# EAGLE board irdroid_secure (EAGLE 6.5.0)
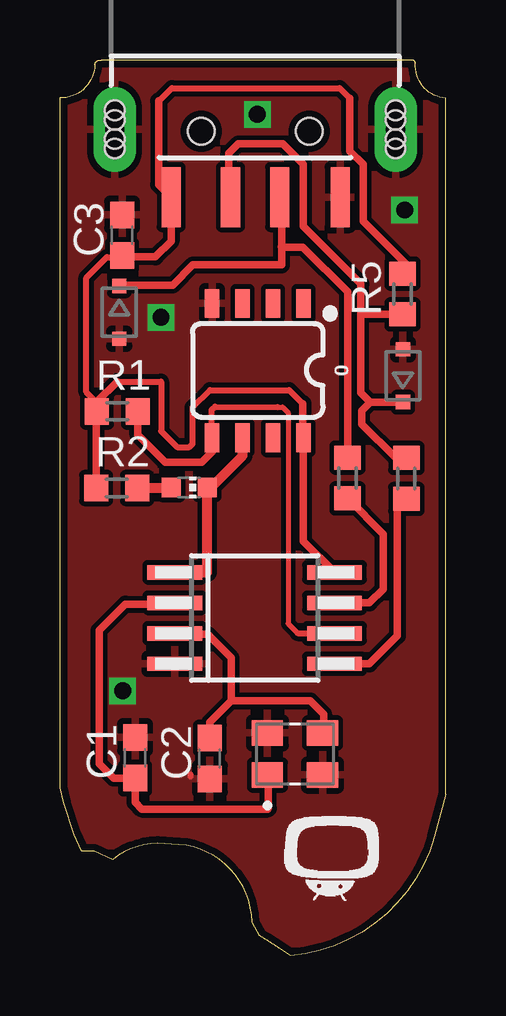
[diagram p0: board, top side]
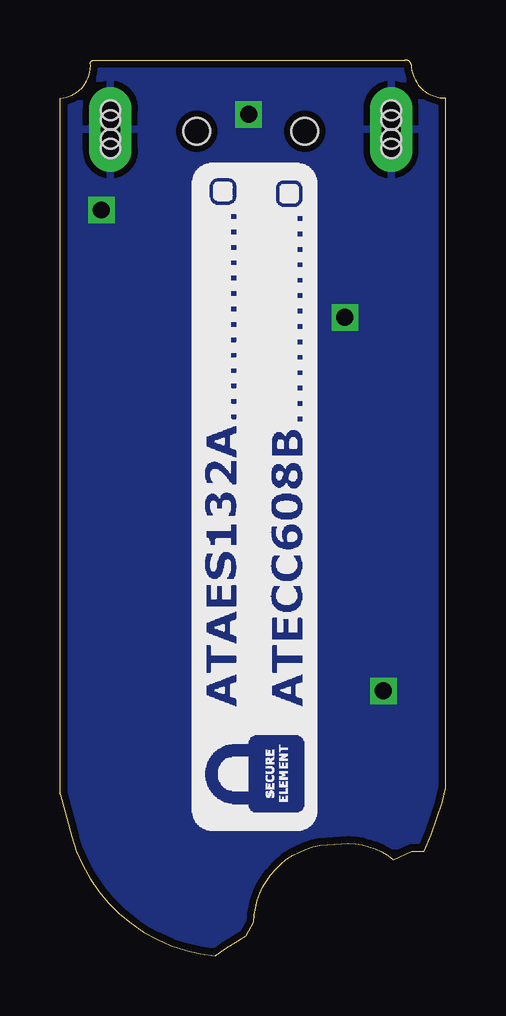
[diagram p1: board, bottom side, seen from below]

Size 16.08 x 37.32 mm. Coordinates in mm from the lower left corner, seen from the top.
Outline: 9.61,0 9.18,0.29 8.58,0.67 8.32,0.84
Outline: 8.32,0.84 8,1.4 arc90 4.64,4.64 arc48 2.2,4.01 1.42,4.35 0.9,4.35 0.6,5.04 0.15,6.38 0,7 0,35.74 arc90 1.45,37.13 arc-90 1.71,37.32 14.64,37.32 arc-90 14.81,37.2
Outline: 9.6,0 arc69 15.6,4.95 16.08,6.72 16.08,35.73 arc-90 14.81,37.2
Outline: 14.81,37.2 14.81,37.19
Copper layers (1*16): Top 0.035mm / dielectric 1.5mm / Bottom 0.035mm
Design rules "default *": minimum track width 8mil, minimum drill 24mil, track to track 8mil, track to pad 8mil, pad to pad 8mil, via to via 8mil, smd to smd 8mil, copper to edge 12mil, drill to drill 8mil, minimum pad ring 10mil, minimum via ring 8mil, stop-mask expansion 4mil, vias tented up to drill 0mil, thermal gap 10mil

## Footprints (pad centres in the part's own frame; a part is rotated, then mirrored left to right if it is on the bottom)
SO08 = smd 0.6 x 1.2: 1 -1.905,-2.8; 2 -0.635,-2.8; 3 0.635,-2.8; 4 1.905,-2.8; 5 1.905,2.8; 6 0.635,2.8; 7 -0.635,2.8; 8 -1.905,2.8
C0603 = smd 1.1 x 1: 1 -0.85,0; 2 0.85,0
SOD323-R = smd 0.6 x 0.6: A 1.1,0; C -1.1,0
USB-A-SMT-MALE = smd 2.5 x 0.8: D+1 10.95,1.027; D-1 10.95,-1.027; GND1 10.95,3.551; VBUS1 10.95,-3.5 | drill 0.8 pad 1.778 long: SHLD1 8.13,-5.85; SHLD2 8.13,5.85 | hole 1.1: 8.2,2.25; 8.2,-2.25 | hole 0.8: 8.53,-5.85; 8.93,-5.85; 7.73,-5.85; 7.33,-5.85; 8.53,5.85; 8.93,5.85; 7.73,5.85; 7.33,5.85
CHIP-LED0603 = smd 0.8 x 0.8: A 0,-0.75; C 0,0.75
SOIC8_EIAJ_208MIL = smd 0.6 x 2.286: 1 -1.905,-3.33; 2 -0.635,-3.33; 3 0.635,-3.33; 4 1.905,-3.33; 5 1.905,3.33; 6 0.635,3.33; 7 -0.635,3.33; 8 -1.905,3.33
R0603 = smd 1 x 1.1: 1 -0.85,0; 2 0.85,0
XTAL_ABM8-16.000MHZ-B2-T = smd 1.05 x 1.3: 1 -0.875,1.15; 2 -0.875,-1.15; 3 0.875,-1.15; 4 0.875,1.15

## Placement (x,y rotation side)
0  Crypto  [SO08]  8.24,24.38 180 top
C1  [C0603]  3.13,8.25 90 top
C2  [C0603]  6.24,8.22 90 top
C3  [C0603]  2.59,30.02 90 top
D1  [SOD323-R]  2.47,26.81 270 top
D2  [SOD323-R]  14.29,24.17 90 top
J1  USB_A_SMT_MALE  [USB-A-SMT-MALE]  8.13,42.56 270 top
LED1  [CHIP-LED0603]  5.38,19.51 270 top
MC  ATTINY45V-10S  [SOIC8_EIAJ_208MIL]  8.11,14.07 270 top
R1  [R0603]  2.39,22.68 0 top
R2  [R0603]  2.36,19.49 0 top
R3  [R0603]  14.43,19.89 270 top
R4  [R0603]  11.98,19.91 270 top
R5  [R0603]  14.27,27.57 90 top
U$2  [IRDROIDLOGO]  13.61,6.08 180 top
Y1  ABM8-16.000MHZ-B2-T  [XTAL_ABM8-16.000MHZ-B2-T]  9.79,8.41 90 top

## Library data of the parts
0 = SparkFun-IC-Memory; PROD_ID: IC-09714
C1-C3 R1-R5 = resistor
D1 D2 = diode
J1 = SparkFun-Connectors; PROD_ID: CONN-11499
LED1 = led
MC = _hhn_attiny25_45_85
U$2 = irdroid_logo
Y1 = ABM8-16.000MHZ-B2-T; AVAILABILITY: In Stock; DESCRIPTION: 16 MHz ±20ppm Crystal 18pF 70 Ohms 4-SMD, No Lead; MF: Abracon; MP: ABM8-16.000MHZ-B2-T; PACKAGE: SMD-4 Abracon; PRICE: None; PURCHASE-URL: https://pricing.snapeda.com/search/part/ABM8-16.000MHZ-B2-T/?ref=eda

## Nets
GND: 0.4 C1.2 C2.1 C3.2 D1.A D2.A J1.GND1 J1.SHLD1 J1.SHLD2 MC.4 Y1.2 Y1.4
N$1: C1.1 MC.2 Y1.1
N$2: C2.2 MC.3 Y1.3
N$3: 0.5 MC.6 R1.2
N$4: 0.6 LED1.C MC.1
N$5: MC.5 R3.2
N$6: MC.7 R4.2
N$7: D2.C J1.D-1 R3.1 R5.1
N$8: LED1.A R2.2
N$10: D1.C J1.D+1 R4.1
VCC: 0.8 C3.1 J1.VBUS1 MC.8 R1.1 R2.1 R5.2

## Tracks (layer width: path | path; a pad name or v marks a point on that pad's centre or on a via)
GND  (via drill 0.7)
  Top 0.254: 2.49,30.77 2.89,30.42 C3.2 | 5.43,7.56 5.43,7.47
  other vias: 4.21,26.6 2.61,11.04 8.22,35.06 14.36,31.07
  pour Top: 1.54,37.25 14.81,37.27 14.81,36.99 arc90 16.08,35.72 16.08,6.66 15.74,5.48 15.46,4.53 15,3.35 14.45,2.54 13.75,1.82 12.91,1.13 12.07,0.71 11.33,0.39 10.27,0.13 9.63,-0.04 8.32,0.85 7.98,1.35 7.88,2.24 7.65,2.79 7.24,3.48 6.81,3.92 6.27,4.25 5.55,4.51 4.81,4.63 4.23,4.64 3.86,4.63 3.44,4.58 3.21,4.5 2.95,4.42 2.58,4.26 2.21,4.02 1.42,4.34 0.92,4.34 -0.02,7.01 -0.01,35.78 0.07,35.78 arc90
  pour Bottom: 1.67,37.32 14.78,37.32 14.78,37.03 arc90 16.08,35.73 16.09,35.73 16.09,6.91 15.98,6.31 15.65,5.27 15.3,4.19 14.79,3.16 14.17,2.32 13.59,1.74 12.96,1.19 12.34,0.83 11.4,0.44 10.79,0.23 10.2,0.12 9.61,0.02 8.29,0.78 7.94,1.49 7.87,2.19 7.57,2.88 7.33,3.42 6.87,3.85 6.55,4.14 6.05,4.37 5.38,4.56 4.83,4.64 4.31,4.71 3.78,4.68 3.35,4.6 2.85,4.38 2.47,4.21 2.23,4.04 1.39,4.32 0.92,4.36 0.66,4.96 0.27,6.1 -0.07,7 -0.02,35.77 0.35,35.76 0.59,35.85 0.79,35.99 0.98,36.12 1.15,36.34 1.32,36.6 1.43,36.91 1.47,37.16
N$1
  Top 0.305: MC.2 4.88,14.81 5.32,14.81 5.16,14.65 2.72,14.65 1.63,13.56 1.63,8 2.23,7.4 C1.1 3.13,6.39 3.41,6.11 8.65,6.11 8.68,6.14 8.68,7.49 Y1.1
N$2
  Top 0.305: C2.2 6.24,9.73 7.13,10.62 | 7.13,10.62 7.13,12.41 6.15,13.39 4.82,13.39 MC.3 | 7.13,10.62 10.43,10.62 10.98,10.07 10.98,9.32 Y1.3
N$3
  Top 0.203: 9.07,22.86 9.28,22.86 9.51,22.63 9.51,13.83 9.9,13.44
  Top 0.254: 11.42,13.45 MC.6 9.9,13.44 | 0.5 6.31,21.6 6.31,22.73 6.46,22.88 9.07,22.86
  Top 0.305: 0.5 6.34,21 5.9,20.56 4.38,20.56 3.24,21.7 R1.2
N$4
  Top 0.406: 0.6 7.61,20.84 6.27,19.51 LED1.C 6.13,15.97 MC.1
N$5
  Top 0.305: MC.5 12.89,12.16 14.06,13.33 14.06,18.67 R3.2
N$6
  Top 0.305: MC.7 12.89,14.7 13.47,15.28 13.47,17.57 R4.2
N$7
  Top 0.305: J1.D-1 7.04,31.67 7.04,33.44 7.43,33.83 9.29,33.83 10.14,32.98 10.14,30.39 12.54,27.99 12.54,26.72 | 14.43,22.93 D2.C 12.93,23.07 | 12.93,23.07 12.54,23.46 12.54,26.72 | R5.1 12.54,26.72 | R3.1 13.98,20.74 12.57,22.15 12.57,22.71 12.93,23.07
N$8
  Top 0.406: R2.2 4.63,19.49 LED1.A
N$10
  Top 0.254: 2.49,27.93 D1.C
  Top 0.305: 9.23,29.53 9.23,31.54 J1.D+1 | R4.1 11.98,27.66 10.11,29.53 9.23,29.53 | 9.22,29.54 9.23,29.53 | D1.C 2.5,27.94 4.69,27.94 5.54,28.79 9.23,28.79 9.23,29.53
VCC
  Top 0.254: 2.38,23.92 4.21,23.92 4.21,21.86 4.88,21.19 5.39,21.19 5.53,21.33 5.53,22.85 6.25,23.57 9.55,23.57 10.12,23 | R1.1 1.54,23.04 1.1,23.48 1.1,28.26 1.95,29.11 2.53,29.11 C3.1 | 4.11,35.62 4.13,35.62 4.66,36.15 11.65,36.15 12.08,35.72
  Top 0.305: J1.VBUS1 4.63,29.78 3.97,29.12 2.64,29.12 C3.1 2.61,29.15 | R2.1 1.51,22.65 R1.1 1.54,23.08 2.38,23.92 | 10.12,23 10.12,21.6 0.8 10.14,17.27 MC.8 | R5.2 14.57,28.66 12.63,30.6 12.63,32.97 12.08,33.52 12.08,35.72 | 4.6,31.64 J1.VBUS1 | 4.11,35.62 4.11,32.13 J1.VBUS1